# Altium PCB Copy of PCB1.PcbDoc
Units mil, origin at the board's own origin, x right, y up, seen from the top; angles counter-clockwise.
Board outline 1962.84 x 1060.65 mil, 2 copper layers (Top Layer, Bottom Layer); 10 components, 8 nets, 55 pads, 4 vias.
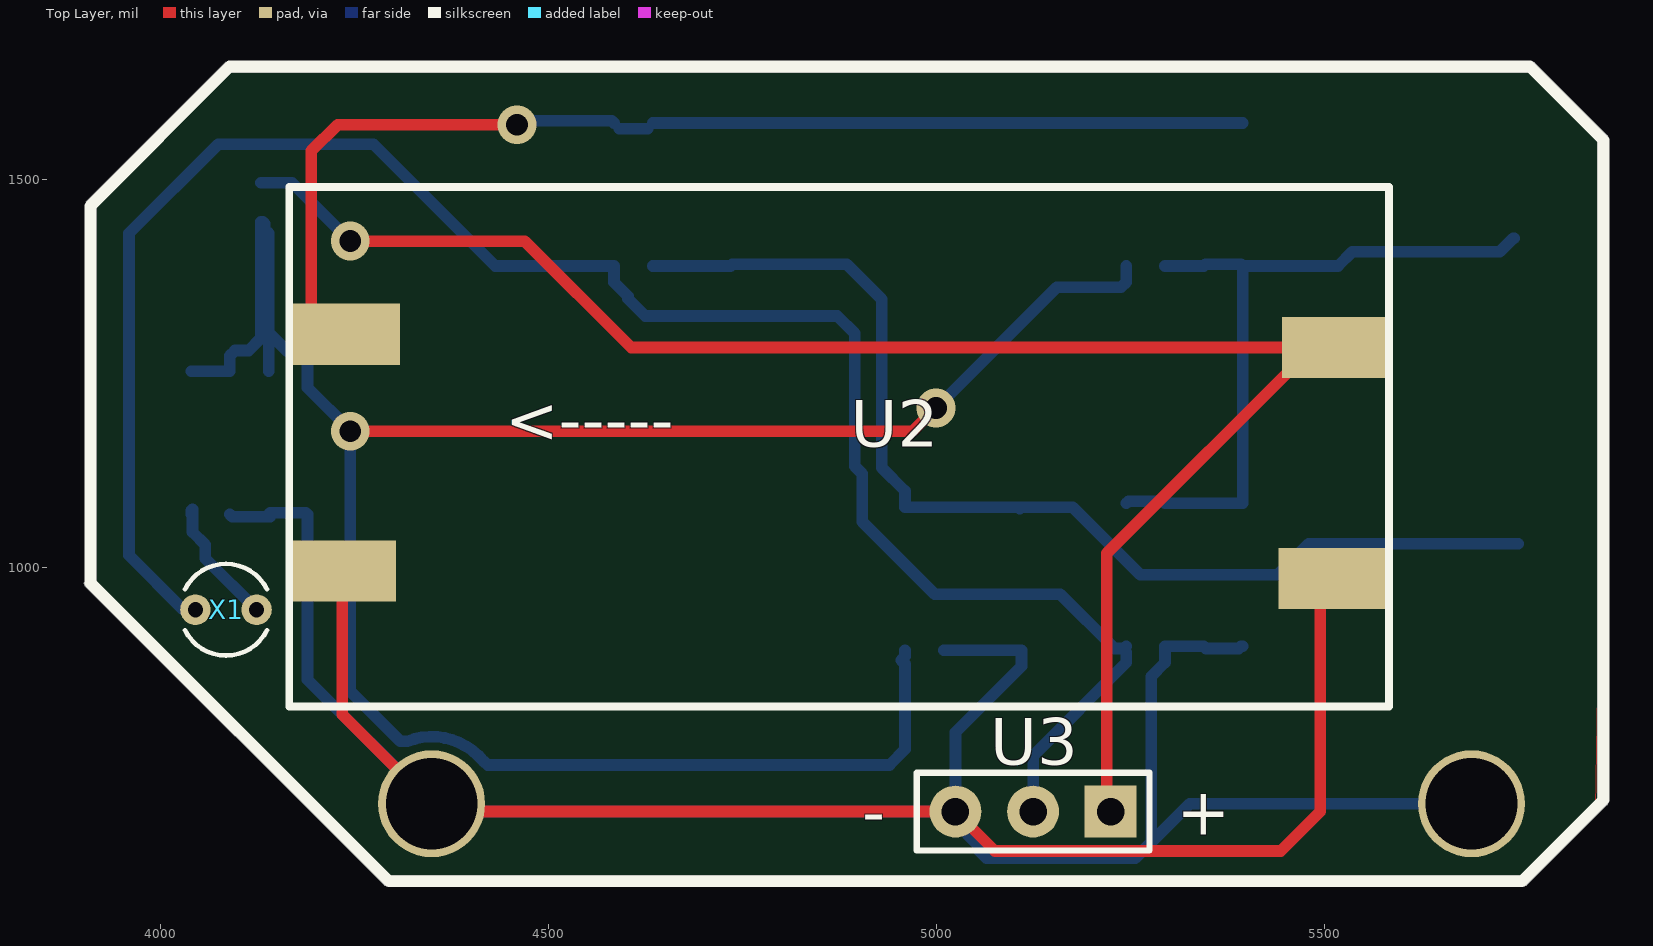
[diagram p0: Top Layer view]
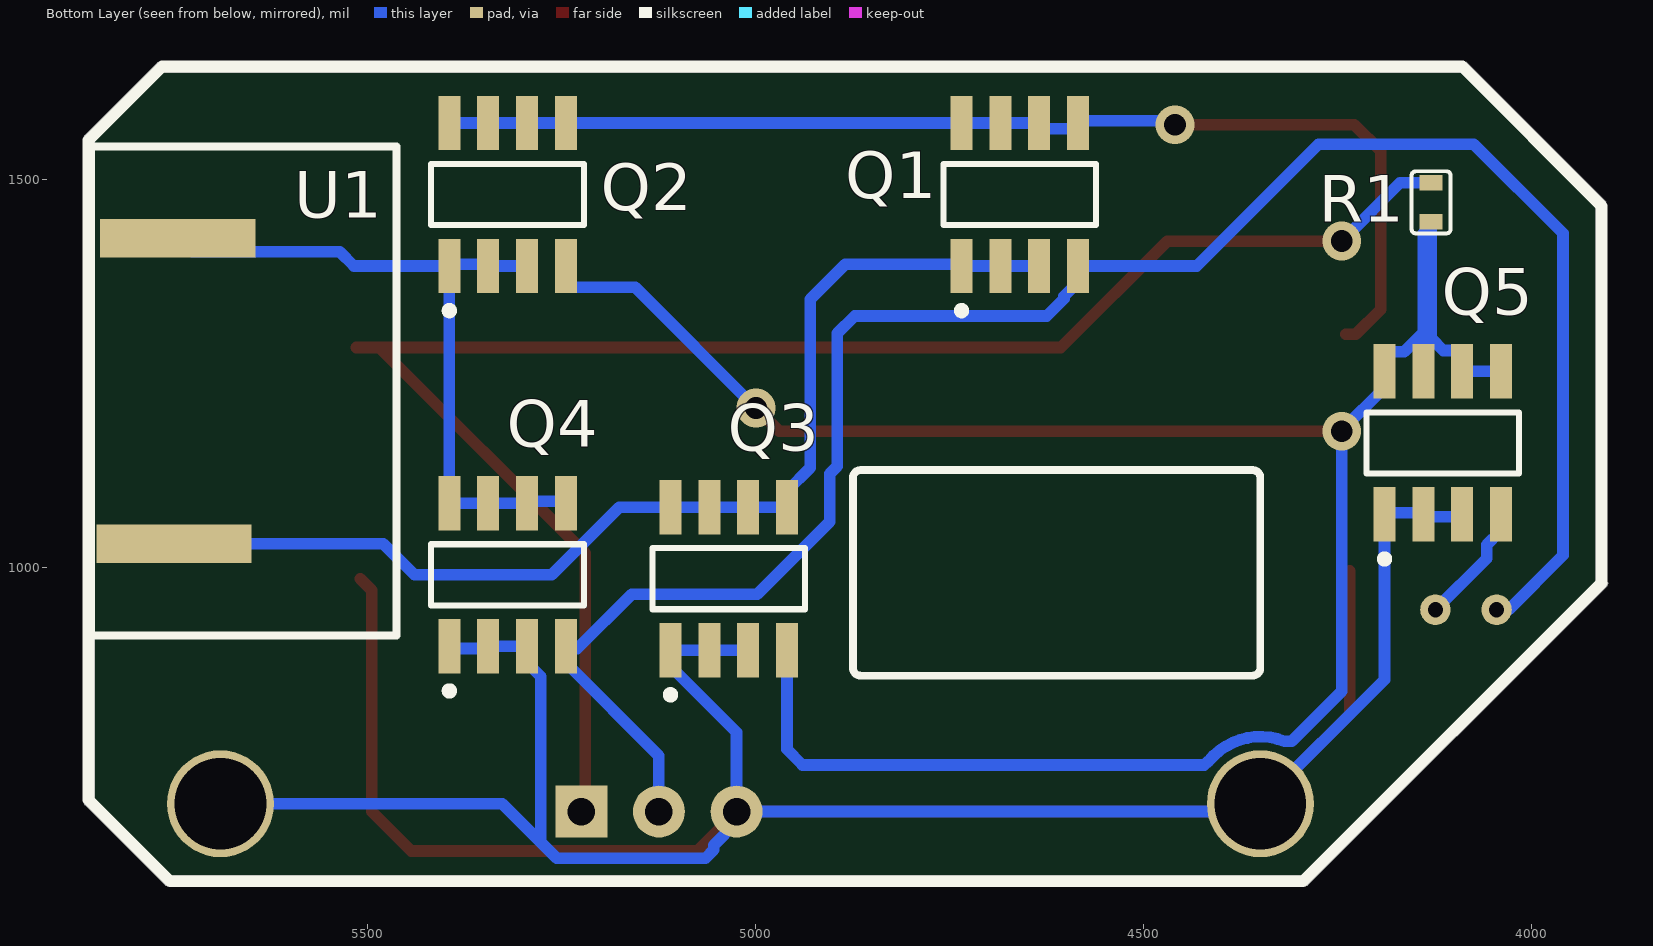
[diagram p1: Bottom Layer view, seen from below]

## Layer stack, top to bottom
Top Solder: solder mask 0.4, Solder Resist, Dk 3.5
Top Layer: signal copper 1.4
Dielectric 1: dielectric 12.6, FR-4, Dk 4.8
Bottom Layer: signal copper 1.4
Bottom Solder: solder mask 0.4, Solder Resist, Dk 3.5

## Board outline
3902.48,980 ccw(c3910,980) 3904.69,974.69 3904.68,974.69 4289.69,589.68 cw(c4295,595) 4289.68,589.69 cw(c4295,595) 4295,602.52 5755,602.52 cw(c5755,595) 5762.52,595 cw(c5755,595) 5760.32,589.69 cw(c5755,595) 5760.31,589.68 5865.32,694.69 cw(c5860,700) 5865.31,694.68 cw(c5860,700) 5852.48,700 5852.48,1550 cw(c5860,1550) 5865.31,1555.32 cw(c5860,1550) 5865.32,1555.3 5770.31,1650.32 cw(c5765,1645) 5770.32,1650.3 cw(c5765,1645) 5772.52,1645 cw(c5765,1645) 5765,1637.49 4090,1637.49 cw(c4090,1645) 4084.68,1650.3 cw(c4090,1645) 4084.69,1650.32 3904.68,1470.3 cw(c3910,1465) 3904.69,1470.32 cw(c3910,1465) 3917.52,1465 3917.52,980 cw(c3910,980) 3904.69,974.68 cw(c3910,980)

## Design rules (kind name [scope] priority, off if disabled: settings)
AssemblyTestPointUsage [All] p0: scope1count=1 scope1_0_kind=Board scope1_0_value=Board scope2count=1 scope2_0_kind=Board scope2_0_value=Board commentlength=0
AssemblyTestpoint [All] p0: scope1count=1 scope1_0_kind=Board scope1_0_value=Board scope2count=1 scope2_0_kind=Board scope2_0_value=Board commentlength=0
Clearance [All] p0: scope1count=1 scope1_0_kind=Board scope1_0_value=Board scope2count=1 scope2_0_kind=Board scope2_0_value=Board commentlength=0 gap=10
Clearance [All] p1: gap=10 ignorepadtopadclearanceinfootprint=FALSE except(0: Arc-Hole Track-Hole SMDPad-Hole THPad-Hole Via-Hole Fill-Hole Poly-Hole Region-Hole Text-Hole)
ComponentClearance [All] p0: scope1count=1 scope1_0_kind=Board scope1_0_value=Board scope2count=1 scope2_0_kind=Board scope2_0_value=Board commentlength=0 gap=10 collisioncheckmode=3
DiffPairsRouting [All] p0: scope1count=1 scope1_0_kind=Board scope1_0_value=Board scope2count=1 scope2_0_kind=Board scope2_0_value=Board commentlength=0
FabricationTestPointUsage [All] p0: scope1count=1 scope1_0_kind=Board scope1_0_value=Board scope2count=1 scope2_0_kind=Board scope2_0_value=Board commentlength=0 valid=0 allowmultiple=FALSE
FabricationTestpoint [All] p0: scope1count=1 scope1_0_kind=Board scope1_0_value=Board scope2count=1 scope2_0_kind=Board scope2_0_value=Board commentlength=0 side=3 testpointundercomponent=TRUE minsize=40 maxsize=100 preferedsize=60 minholesize=0 maxholesize=40 preferedholesize=32 testpointgrid=1
FanoutControl Fanout_BGA [All] p0 off: scope1count=1 scope1_0_kind=Board scope1_0_value=Board scope2count=1 scope2_0_kind=Board scope2_0_value=Board commentlength=69 // Protel DXP Scope 1 Expression Was: IsBGA   Fanout_BGA (Default Rule)
FanoutControl Fanout_LCC [All] p0 off: scope1count=1 scope1_0_kind=Board scope1_0_value=Board scope2count=1 scope2_0_kind=Board scope2_0_value=Board commentlength=69 // Protel DXP Scope 1 Expression Was: IsLCC   Fanout_LCC (Default Rule)
FanoutControl Fanout_SOIC [All] p0 off: scope1count=1 scope1_0_kind=Board scope1_0_value=Board scope2count=1 scope2_0_kind=Board scope2_0_value=Board commentlength=71 // Protel DXP Scope 1 Expression Was: IsSOIC   Fanout_SOIC (Default Rule)
FanoutControl Fanout_Small [All] p0 off: scope1count=1 scope1_0_kind=Board scope1_0_value=Board scope2count=1 scope2_0_kind=Board scope2_0_value=Board commentlength=84 // Protel DXP Scope 1 Expression Was: (CompPinCount < 5)   Fanout_Small (Default Rule)
FanoutControl Fanout_Default [All] p0: scope1count=1 scope1_0_kind=Board scope1_0_value=Board scope2count=1 scope2_0_kind=Board scope2_0_value=Board commentlength=30 // Fanout_Default (Default Rule)
Height [All] p0: scope1count=1 scope1_0_kind=Board scope1_0_value=Board scope2count=1 scope2_0_kind=Board scope2_0_value=Board commentlength=0
HoleSize [All] p0: scope1count=1 scope1_0_kind=Board scope1_0_value=Board scope2count=1 scope2_0_kind=Board scope2_0_value=Board commentlength=0 absolutevalues=TRUE maxlimit=100 minlimit=1 maxpercent=80.000 minpercent=20.000
HoleToHoleClearance [All] p0: scope1count=1 scope1_0_kind=Board scope1_0_value=Board scope2count=1 scope2_0_kind=Board scope2_0_value=Board commentlength=0
LayerPairs [All] p0: scope1count=1 scope1_0_kind=Board scope1_0_value=Board scope2count=1 scope2_0_kind=Board scope2_0_value=Board commentlength=0 enforce=TRUE
MinimumSolderMaskSliver [All] p0: scope1count=1 scope1_0_kind=Board scope1_0_value=Board scope2count=1 scope2_0_kind=Board scope2_0_value=Board commentlength=0
NetAntennae [All] p0: scope1count=1 scope1_0_kind=Board scope1_0_value=Board scope2count=1 scope2_0_kind=Board scope2_0_value=Board commentlength=0
PasteMaskExpansion [All] p0: scope1count=1 scope1_0_kind=Board scope1_0_value=Board scope2count=1 scope2_0_kind=Board scope2_0_value=Board commentlength=0 expansion=0
PlaneClearance [All] p0: scope1count=1 scope1_0_kind=Board scope1_0_value=Board scope2count=1 scope2_0_kind=Board scope2_0_value=Board commentlength=0 clearance=20
PlaneConnect [All] p0: scope1count=1 scope1_0_kind=Board scope1_0_value=Board scope2count=1 scope2_0_kind=Board scope2_0_value=Board commentlength=0 planeconnectstyle=Relief reliefexpansion=20 reliefentries=4 reliefconductorwidth=10 reliefairgap=10
PolygonConnect [All] p0: scope1count=1 scope1_0_kind=Board scope1_0_value=Board scope2count=1 scope2_0_kind=Board scope2_0_value=Board commentlength=0 connectstyle=Relief reliefconductorwidth=10 reliefentries=4 polygonreliefangle="90 Angle"
PolygonConnect [All] p1: connectstyle=Relief reliefconductorwidth=10 reliefentries=4 polygonreliefangle="90 Angle" airgapwidth=10
RoutingCorners [All] p0: scope1count=1 scope1_0_kind=Board scope1_0_value=Board scope2count=1 scope2_0_kind=Board scope2_0_value=Board commentlength=0 cornerstyle=45-Degree minsetback=100 maxsetback=100
RoutingLayers [All] p0: scope1count=1 scope1_0_kind=Board scope1_0_value=Board scope2count=1 scope2_0_kind=Board scope2_0_value=Board commentlength=0 top layer=Automatic bottom layer=Automatic
RoutingPriority [All] p0: scope1count=1 scope1_0_kind=Board scope1_0_value=Board scope2count=1 scope2_0_kind=Board scope2_0_value=Board commentlength=0
RoutingTopology [All] p0: scope1count=1 scope1_0_kind=Board scope1_0_value=Board scope2count=1 scope2_0_kind=Board scope2_0_value=Board commentlength=0 topology=Shortest
RoutingVias [All] p0: scope1count=1 scope1_0_kind=Board scope1_0_value=Board scope2count=1 scope2_0_kind=Board scope2_0_value=Board commentlength=0 holewidth=28 width=50 viastyle="Through Hole" minholewidth=28 minwidth=50 maxholewidth=28 maxwidth=50
RoutingVias [All] p1: holewidth=28 width=50 viastyle="Through Hole" minholewidth=28 minwidth=50 maxholewidth=28 maxwidth=50
ShortCircuit [All] p0: scope1count=1 scope1_0_kind=Board scope1_0_value=Board scope2count=1 scope2_0_kind=Board scope2_0_value=Board commentlength=0 allowed=FALSE
SilkToBoardRegionClearance [All] p0: scope1count=1 scope1_0_kind=Board scope1_0_value=Board scope2count=1 scope2_0_kind=Board scope2_0_value=Board commentlength=0
SilkToSilkClearance [All] p0: scope1count=1 scope1_0_kind=Board scope1_0_value=Board scope2count=1 scope2_0_kind=Board scope2_0_value=Board commentlength=0
SilkToSolderMaskClearance [All] p0 off: scope1count=1 scope1_0_kind=Board scope1_0_value=Board scope2count=1 scope2_0_kind=Board scope2_0_value=Board commentlength=44 // Protel DXP Scope 1 Expression Was: IsPad
SolderMaskExpansion [All] p0: scope1count=1 scope1_0_kind=Board scope1_0_value=Board scope2count=1 scope2_0_kind=Board scope2_0_value=Board commentlength=0 expansion=4
SolderMaskExpansion [All] p1: expansion=4 istentingtop=FALSE
UnConnectedPin Vcc [All] p0: scope1count=1 scope1_0_kind=Net scope1_0_value=+5 scope2count=1 scope2_0_kind=Board scope2_0_value=Board commentlength=0
UnConnectedPin Vcc [InNet('+5')] p1:
UnRoutedNet [All] p0: scope1count=1 scope1_0_kind=Board scope1_0_value=Board scope2count=1 scope2_0_kind=Board scope2_0_value=Board commentlength=0
UnpouredPolygon [All] p0: scope1count=1 scope1_0_kind=Board scope1_0_value=Board scope2count=1 scope2_0_kind=Board scope2_0_value=Board commentlength=0
Width [All] p0: scope1count=1 scope1_0_kind=Board scope1_0_value=Board scope2count=1 scope2_0_kind=Board scope2_0_value=Board commentlength=0 maxlimit=20 minlimit=10 preferedwidth=20
Width [All] p1: maxlimit=20 minlimit=10 preferedwidth=20 minimp=50.000000 maximp=50.000000 favimp=50.000000
30 further rules are at their usual default settings.

## Components (designator, comment, footprint, x,y, rotation, side; value= is the part's Value field where it differs from the comment)
Q1 "" FP-PG-DSO-8-MFG 4660,1480 r90 bottom
Q2 "IRF8736TRPBF" FP-PG-DSO-8-MFG 5320,1480 r90 bottom
Q3 "IRF8736TRPBF" FP-PG-DSO-8-MFG 5035,985 r90 bottom
Q4 "IRF8736TRPBF" FP-PG-DSO-8-MFG 5320,990 r90 bottom
Q5 "IRF8736TRPBF" FP-PG-DSO-8-MFG 4115,1160 r90 bottom
R1 "4.7k" 0603 4130,1470 r90 bottom
U1 "超声波探头" 超声波探头 5660,1226.85 r0 bottom
U2 "DC-DC板" DC-DC板 4875,1155 r0 top
U3 "3端子" HDR2.54-LI-3P 5125,685 r180 top
X1 "40kHz" OSC-3x8-LI 4085,945 r0 top

## Footprints (in the part's own frame and the unit in brackets; to place one, negate y for a bottom-side part, rotate by r counter-clockwise, add the part's x,y. Pads: shape width x height; smd on the part's side, far side on the other; paste and mask are expansions set on the pad)
0603 [mil]
  rect 20x30 smd: 1(-25,0) 2(25,0)
  silkscreen extent -40,-25 40,25
DC-DC板 [mil]
  rect 138.11x78.74 smd: 1(640,127.95) 2(635,-170) 3(-635,145) 4(-640,-160)
  silkscreen extent -709,-335 709,335
FP-PG-DSO-8-MFG [mm]
  rect 1.78x0.72 smd paste+0 mask+0: 1(-2.34,1.905) 2(-2.34,0.635) 3(-2.34,-0.635) 4(-2.34,-1.905) 5(2.34,-1.905) 6(2.34,-0.635) 7(2.34,0.635) 8(2.34,1.905)
  silkscreen extent -3.92,-2.5 1,2.5
HDR2.54-LI-3P [mm] "排针，3脚"
  rect 1.7x1.7 hole 0.9: 1(-2.54,0)
  round 1.7 hole 0.9: 2(0,0) 3(2.54,0)
  silkscreen extent -3.81,-1.27 3.81,1.27
OSC-3x8-LI [mm] "脚距：2mm                  封装库来自淘宝卖家 ID：黄晶宝石"
  round 1 hole 0.5: 1(1,0) 2(-1,0)
  silkscreen extent -1.34,-1.5 1.34,1.5
超声波探头 [mil]
  rect 200x50 smd: 1(90,196.85) 2(85,-196.85)
  silkscreen extent -197,-315 197,315

## Part data
Q1 Q2 Q3 Q4 Q5: library part CMP-32901-000123-1, "MOSFET N-CH 30V 18A 8-SOIC"
R1: library part 0603
X1: library part XTAL-2P, "2脚无源脚晶振"

## Free pads (board coordinates)
  round 137.8 hole 118.11: 3(4350,695) 4(5690,695)

## Via types
v1: diameter 50, hole 28, Top Layer to Bottom Layer, 4 vias

## Nets (pads, with @x,y where several pads share a name; then routed paths per layer and width w, separated by ;. In a path a pad name is that pad's centre, name@x,y a point inside that pad or via, vN(x,y) a via of type N, cw(c..) or ccw(c..) an arc to the next point about the centre after c; other vN are vias at no path point)
+5: R1.2 U2.1 U3.1 | length 2192.8
  Top Layer w15: v1(4245,1420) 4470,1420 4607.05,1282.95 U2.1@5485.32,1282.95 ; U3.1 5225,690 5220,695 5220,1017.64 U2.1@5485.32,1282.95 ; U2.1 U2.1@5485.32,1282.95
  Bottom Layer w15: R1.2 4170,1495 4240,1425 4240,1415 v1(4245,1420)
-Din: Q2.4 Q3.4 Q5.5 Q5.6 Q5.7 Q5.8 R1.1 | length 2976.5
  Top Layer w15: v1(4245,1175) 4970,1175 v1(5000,1205)
  Bottom Layer w15: Q5.5 Q5.6@4087.13,1252.13 ; Q5.6 4090,1272.41 4096.67,1279.08 4114.08,1279.08 4130,1295 R1.1 4132.5,1445 4135,1442.5 4135,1435 4140,1430 4140,1302.13 ; Q5.7 4140,1302.13 ; Q3.4 4960,885 4955,880 4960,875 4960,765 4940,745 4427.82,745 4422.18,745 4417.94,748.71 cw(c4427.82,760) 4416.37,750.31 ccw(c4350,695) 4318.48,775.44 4315.77,775.44 4309.56,775.44 4245,840 4245,1176.26 4190,1231.26 4190,1270.97 4183.33,1277.64 4164.48,1277.64 4140,1302.13 ; v1(5000,1205) 5155.33,1360.33 5238.33,1360.33 5245,1367.01 Q2.4
Din: Q1.4 Q4.4 U3.2 X1.2 | length 2545
  Bottom Layer w15: X1.2 4030,945 3960,1015 3960,1430 4075,1545 4275,1545 4432.13,1387.87 Q1.4 4585,1367.01 4602.97,1349.04 4602.97,1345.94 4625.34,1323.58 4872.64,1323.58 4895,1301.21 4895,1130 4905,1120 4905,1058.16 4998.16,965 5160,965 5230,895 Q4.4@5240,895 ; U3.2 5125,757.01 5245,877.01 5245,890 Q4.4@5240,895 ; Q4.4 5242.13,895 Q4.4@5240,895
GND: pad.3 pad.4 Q3.1 Q3.2 Q3.3 Q4.1 Q4.2 Q4.3 Q5.1 Q5.2 Q5.3 U2.2 U2.4 U3.3 | length 4504.6
  Top Layer w15: U2.4 4235,810 4360,685 U3.3 5075.96,634.04 5444.04,634.04 5495,685 5495,970 U2.2
  Bottom Layer w15: Q5.3 4092.87,1065 Q5.2@4142.13,1065 ; Q5.2 4142.13,1070 4187.87,1070 Q5.1 4190,855 pad.3 4360,685 U3.3 ; Q3.3 Q3.2 Q3.1 5110,872.01 5025,787.01 U3.3 ; Q4.1 5392.87,897.87 5390,895 5347.87,895 Q4.2 Q4.3 5295,877.01 5277.03,859.04 5277.03,645.35 ; pad.4 5326.68,695 5277.03,645.35 ; U3.3 5025,670.95 5054.39,641.55 5054.39,635.61 5065,625 5256.68,625 5277.03,645.35
NetQ1_1: Q1.1 Q1.2 Q1.3 Q3.5 Q3.6 Q3.7 Q3.8 U1.1 | length 1436.2
  Bottom Layer w15: Q1.3 Q1.2 Q1.1 4737.13,1390 4885,1390 4930,1345 4930,1127.99 4960,1097.99 Q3.5 Q3.6 Q3.7 5105.75,1077.13 Q3.8@5107.87,1075 ; Q3.8 5176.04,1077.13 5263.16,990 5440,990 5480,1030 U1.1
NetQ1_5: Q1.5 Q1.6 Q1.7 Q1.8 Q2.5 Q2.6 Q2.7 Q2.8 U2.3 | length 1466.5
  Top Layer w15: U2.3 4226.87,1300 4195,1331.87 4195,1536.21 4228.79,1570 v1(4460,1570)
  Bottom Layer w15: v1(4460,1570) 4465,1575 4582.13,1575 Q1.5 ; Q1.5@4591.67,1565 Q1.6@4628.33,1565 ; Q1.6 Q1.7 Q1.8 Q2.5 Q2.6 Q2.7 Q2.8
NetQ2_1: Q2.1 Q2.2 Q2.3 Q4.5 Q4.6 Q4.7 Q4.8 U1.2 | length 924.7
  Bottom Layer w15: Q4.5 5247.87,1085 5292.13,1085 Q4.6 Q4.7 Q4.8 Q2.1 ; Q2.3 Q2.2 5347.13,1390 5392.87,1390 Q2.1 ; U1.2 5743.7,1423.7 5726.2,1406.2 5536.25,1406.2 5517.92,1387.87 Q2.1
NetQ5_4: Q5.4 X1.1 | length 171.3
  Bottom Layer w15: Q5.4 4040,1072.82 4041.81,1074.63 4041.81,1045.19 4058.33,1028.68 4058.33,1011.04 X1.1

## Polygon pours and split planes (outlines as drawn)
GND on Bottom Layer "GND_L02_P000" (solid, pour order 0): 4090,1640 3920,1470 3915,1470 3910,1465 3910,980 4295,595 5760,595 5860,695 5860,1545 5770,1635 5770,1645
GND on Top Layer "GND_L01_P001" (solid, pour order 1): 4090,1645 3910,1465 3910,975 4290,595 5755,595 5850,690 5865,1540 5865,1550 5770,1645 5765,1645

## Silkscreen, mask and mechanical layers (free items; w line width, h text height)
Top Overlay:
  lines w15: 3910,980 4295,595 5755,595 5860,700 5860,1550 5765,1645 4090,1645 3910,1465 3910,980
  text "<-----" at 4445,1160 h60
  text "-" at 4905,655.01 h60
  text "+" at 5310,655 h60
Bottom Overlay:
  lines w10: 4350,870 ccw(c4360,870) 4360,860 4865,860 ccw(c4865,870) 4875,870 4875,1115 ccw(c4865,1115) 4865,1125 4360,1125 ccw(c4360,1115) 4350,1115 4350,870
  lines w15: 3910,980 4295,595 5755,595 5860,700 5860,1550 5765,1645 4090,1645 3910,1465 3910,980

## Text inside footprints (layer, text, board x,y; h text height)
Q1: Top Component Center "IRF8736TRPBF" at 4809.5,1280.5 h60